# EAGLE board Prototype1.b#2 (EAGLE 6.1)
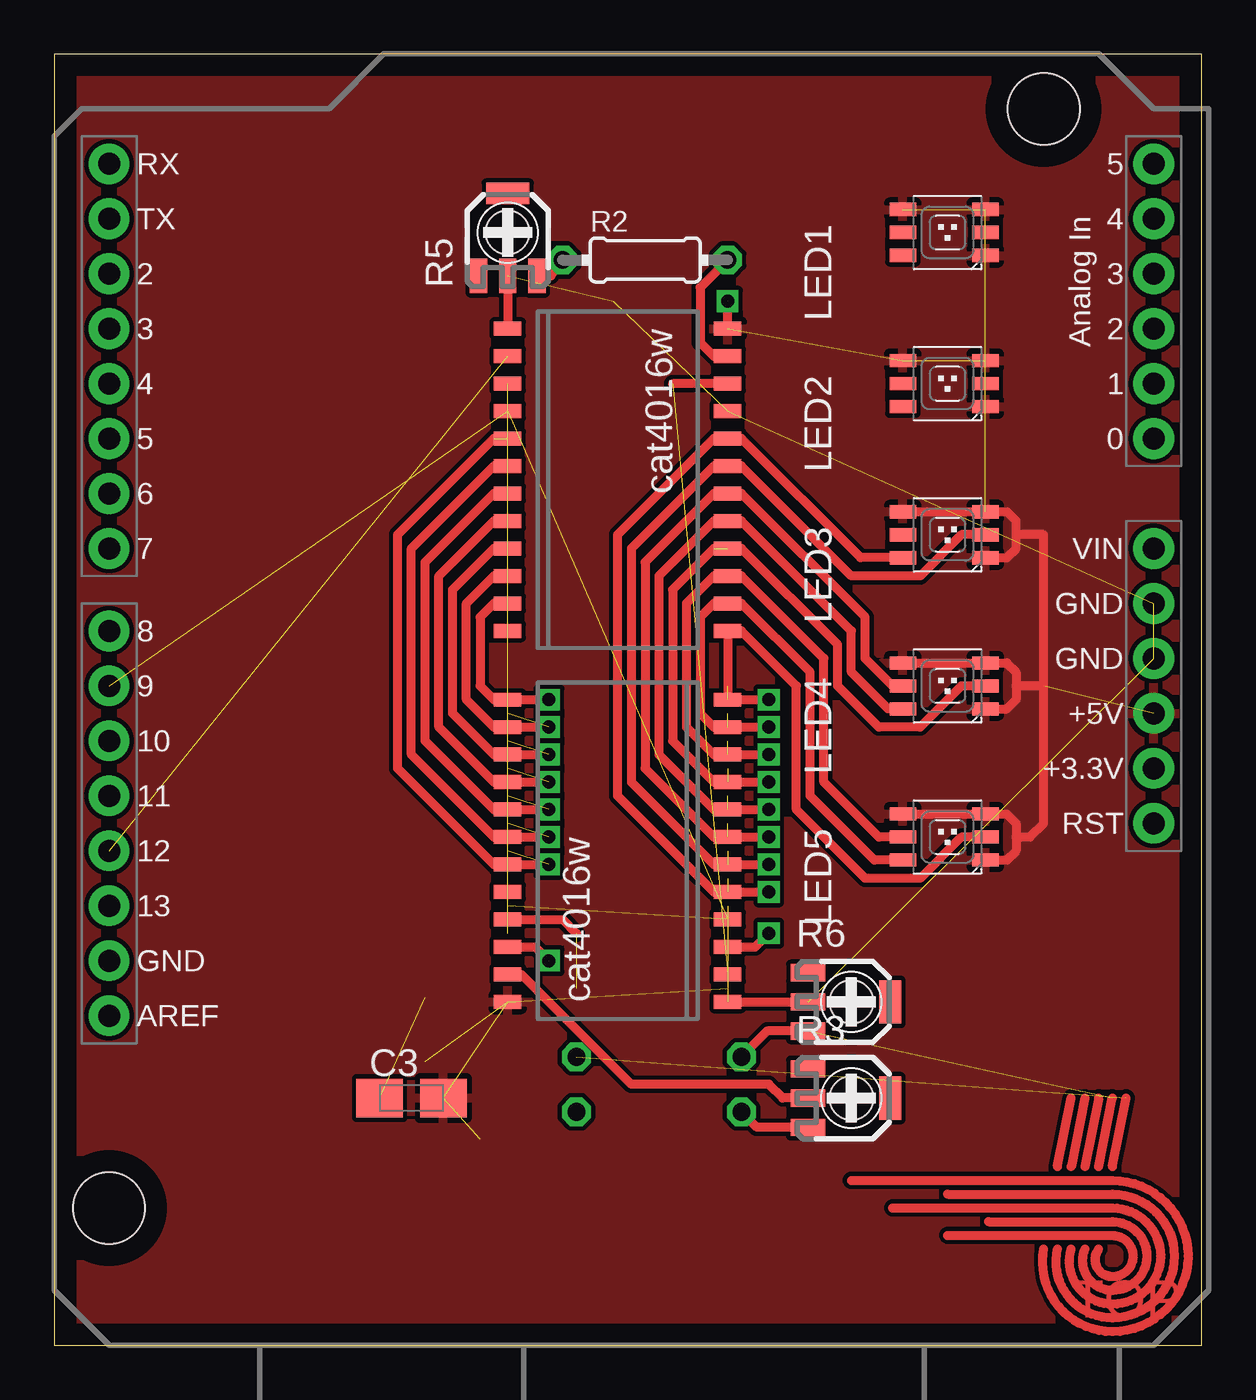
[diagram p0: board, top side]
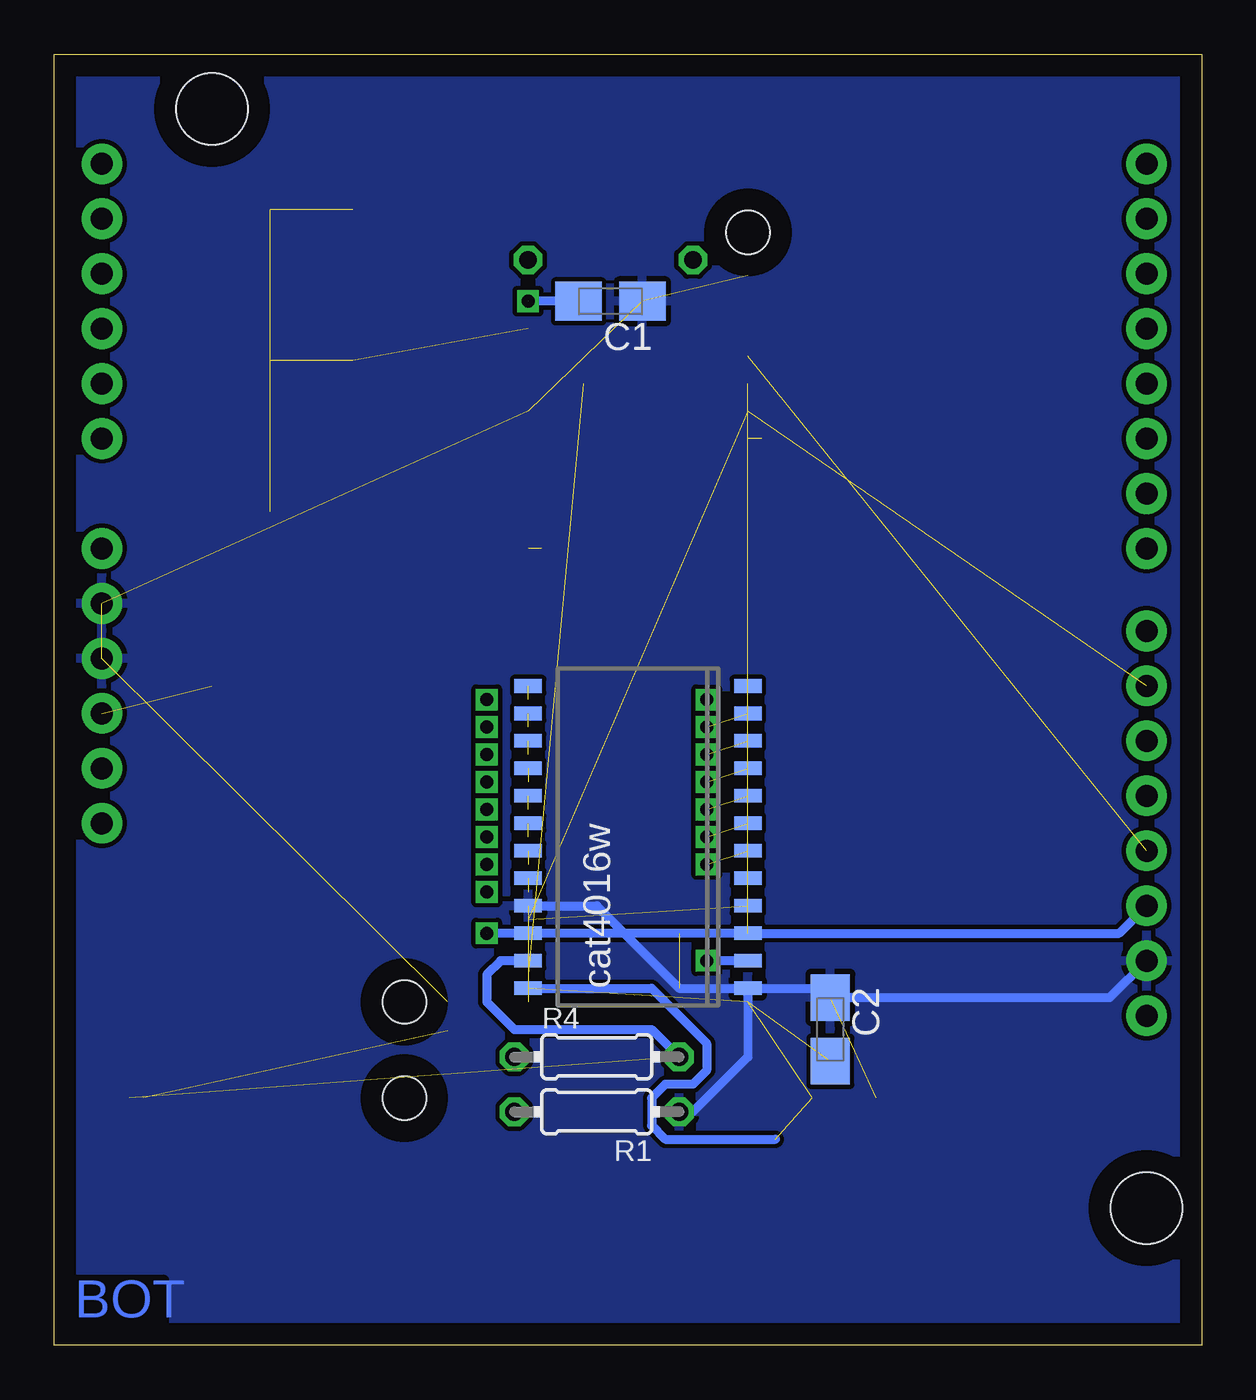
[diagram p1: board, bottom side, seen from below]

Size 53.01 x 59.68 mm. Coordinates in mm from the lower left corner, seen from the top.
Outline: 0,0 53.01,0 53.01,59.68 0,59.68 0,0
Copper layers (1*16): Top 0.035mm / dielectric 1.5mm / Bottom 0.035mm
Design rules: minimum track width 10mil, minimum drill 24mil, track to track 8mil, track to pad 8mil, pad to pad 8mil, via to via 8mil, smd to smd 8mil, copper to edge 40mil, drill to drill 8mil, minimum pad ring 10mil, minimum via ring 8mil, stop-mask expansion 4mil, vias tented up to drill 0mil, thermal gap 10mil

## Footprints (pad centres in the part's own frame; a part is rotated, then mirrored left to right if it is on the bottom)
A/3216-18W = smd 2.15 x 1.8: + 1.475,0; - -1.475,0
P-LCC-6_TOPLED = smd 0.61 x 1.219: A1 -1.062,-1.748; A2 1.062,-1.748; A3 1.062,2.065; C1 -1.062,2.065; C2 0,-1.748; C3 0,2.065
0204/7 = drill 0.813 octagon: 1 -3.81,0; 2 3.81,0
RTRIM3165W = smd 0.8 x 1.6: 1 -1.35,-2; 2 0,-2; 3 1.35,-2 | smd 2 x 1: 4 0,1.8 | hole 2: 0,0
DUEMILANOVE_SHIELD = drill 1.016 pad 1.88: 3.3V 50.8,26.67; 5V 50.8,29.21; A0 50.8,41.91; A1 50.8,44.45; A2 50.8,46.99; A3 50.8,49.53; A4 50.8,52.07; A5 50.8,54.61; AREF 2.54,15.24; D2 2.54,49.53; D3 2.54,46.99; D4 2.54,44.45; D5 2.54,41.91; D6 2.54,39.37; D7 2.54,36.83; D8 2.54,33.02; D9 2.54,30.48; D10 2.54,27.94; D11 2.54,25.4; D12 2.54,22.86; D13 2.54,20.32; GND@0 50.8,31.75; GND@1 50.8,34.29; GND@2 2.54,17.78; RES 50.8,24.13; RX 2.54,54.61; TX 2.54,52.07; VIN 50.8,36.83 | hole 3.302: 45.72,57.15; 2.54,6.35
SOIC24W = smd 0.635 x 1.27: 1 -6.985,-5.08; 2 -5.715,-5.08; 3 -4.445,-5.08; 4 -3.175,-5.08; 5 -1.905,-5.08; 6 -0.635,-5.08; 7 0.635,-5.08; 8 1.905,-5.08; 9 3.175,-5.08; 10 4.445,-5.08; 11 5.715,-5.08; 12 6.985,-5.08; 13 6.985,5.08; 14 5.715,5.08; 15 4.445,5.08; 16 3.175,5.08; 17 1.905,5.08; 18 0.635,5.08; 19 -0.635,5.08; 20 -1.905,5.08; 21 -3.175,5.08; 22 -4.445,5.08; 23 -5.715,5.08; 24 -6.985,5.08

## Placement (x,y rotation side)
C1  [A/3216-18W]  27.3,48.26 180 bottom
C2  [A/3216-18W]  17.14,14.61 270 bottom
C3  [A/3216-18W]  16.51,11.43 0 top
LED1  MULTILED_LRTB_G6TG  [P-LCC-6_TOPLED]  41.27,51.44 90 top
LED2  MULTILED_LRTB_G6TG  [P-LCC-6_TOPLED]  41.27,44.45 90 top
LED3  MULTILED_LRTB_G6TG  [P-LCC-6_TOPLED]  41.27,37.47 90 top
LED4  MULTILED_LRTB_G6TG  [P-LCC-6_TOPLED]  41.27,30.48 90 top
LED5  MULTILED_LRTB_G6TG  [P-LCC-6_TOPLED]  41.27,23.5 90 top
R1  [0204/7]  27.94,10.79 180 bottom
R2  [0204/7]  27.3,50.16 0 top
R3  [RTRIM3165W]  36.83,11.43 270 top
R4  [0204/7]  27.94,13.34 0 bottom
R5  [RTRIM3165W]  20.95,51.44 0 top
R6  [RTRIM3165W]  36.83,15.88 270 top
U1  ARDUINO_SHIELDLABEL  [DUEMILANOVE_SHIELD]  0,0 0 top
U$1  CAT4016  [SOIC24W]  26.04,22.86 90 top
U$2  CAT4016  [SOIC24W]  26.04,23.5 90 bottom
U$3  CAT4016  [SOIC24W]  26.04,40.01 270 top

## Library data of the parts
C1-C3 R1-R6 = rcl
LED1-LED5 = customized
U1 = SparkFun
U$1-U$3 = CAT4016

## Nets
+5V: C1.+ C2.+ C3.+ LED1.A1 LED1.A2 LED1.A3 LED2.A1 LED2.A2 LED2.A3 LED3.A1 LED3.A2 LED3.A3 LED4.A1 LED4.A2 LED4.A3 LED5.A1 LED5.A2 LED5.A3 U1.5V U$1.24 U$2.24 U$3.24
GND: C1.- C2.- C3.- R1.1 R5.2 R6.2 U1.GND@0 U1.GND@1 U1.GND@2 U$1.1 U$1.21 U$2.1 U$2.21 U$3.1 U$3.21
N$1: R2.2 U$3.23
N$2: R2.1 R5.3
N$3: R4.2 U$2.23
N$4: U$1.2 U$3.22
N$5: U1.D12 U$3.2
N$6: U1.D9 U$1.4 U$2.4 U$3.4
N$7: R4.1 R6.3
N$8: R1.2 R3.3
N$9: R3.2 U$1.23
N$10: U$1.22 U$2.2
N$14: U1.D13 U$1.3 U$2.3 U$3.3
N$15: LED5.C2 U$1.12 U$2.13 U$3.13
N$18: LED5.C1 U$1.11 U$2.14 U$3.14
N$19: LED5.C3 U$1.10 U$2.15 U$3.15
N$20: LED4.C2 U$1.9 U$2.16 U$3.16
N$21: LED4.C1 U$1.8 U$2.17 U$3.17
N$22: LED4.C3 U$1.7 U$2.18 U$3.18
N$23: LED3.C2 U$1.6 U$2.19 U$3.19
N$25: U$1.13 U$2.12 U$3.11
N$31: U$1.14 U$2.11 U$3.10
N$32: U$1.15 U$2.10 U$3.9
N$33: U$1.16 U$2.9 U$3.8
N$34: U$1.17 U$2.8 U$3.7
N$39: U$1.18 U$2.7 U$3.6
N$43: U$1.19 U$2.6 U$3.5
N$59: LED3.C1 U$1.5 U$2.20 U$3.20

## Tracks (layer width: path | path; a pad name or v marks a point on that pad's centre or on a via)
+5V  (13 unrouted)
  Top 0.406: LED3.A3 LED3.A2 44.02,38.53 44.45,38.1 44.45,37.47 | LED3.A1 44.02,36.4 44.45,36.83 44.45,37.47 | LED4.A3 LED4.A2 44.02,31.54 44.45,31.11 44.45,30.48 | 44.45,30.48 44.45,29.84 44.02,29.42 LED4.A1 | LED5.A3 LED5.A2 44.02,24.56 44.45,24.13 44.45,23.5 | 44.45,23.5 44.45,22.86 44.02,22.43 LED5.A1 | 44.45,23.5 45.09,23.5 45.72,24.13 45.72,30.48 | 45.72,30.48 44.45,30.48 | 45.72,30.48 45.72,37.47 44.45,37.47 | U$3.24 31.11,48.26
  Bottom 0.406: C1.+ 31.11,48.26 | U$2.24 25.4,16.51 22.86,13.97 22.86,12.7 23.5,12.06 24.77,12.06 25.4,11.43 25.4,10.16 24.77,9.53 19.68,9.53
  pour Top: 0,0 53.34,0 53.34,59.69 0,59.69
GND  (8 unrouted)
  Top 0.406: R5.2 U$3.1 | U$1.21 23.5,19.68 24.13,19.05 | U$1.1 R6.2
  Bottom 0.406: U$2.1 20.95,13.34 23.5,10.79 R1.1 | U$2.21 27.94,20.32 24.13,16.51 U$2.1 | U$2.1 17.57,16.51 C2.- 4.24,16.08 U1.GND@2
  pour Bottom: 0,59.69 53.34,59.69 53.34,0 0,0
N$1
  Top 0.406: R2.2 29.84,48.9 29.84,46.35 30.48,45.72 U$3.23
N$2
  Top 0.406: R5.3 22.95,49.44 R2.1
N$3  (1 unrouted)
  Top 0.406: 48.9,8.26 49.53,11.43
  Bottom 0.406: U$2.23 32.38,17.78 33.02,17.14 33.02,15.88 31.75,14.61 25.4,14.61 R4.2
N$4  (1 unrouted)
  Top 0.406: U$3.22 28.57,44.45
N$5  (1 unrouted)
N$6  (3 unrouted)
N$7  (1 unrouted)
  Top 0.406: 48.26,8.26 48.9,11.43 | R6.3 32.94,14.53 R4.1
N$7  (via drill 0.6)
  other vias: 31.11,48.26
N$8
  Top 0.406: R3.3 32.47,10.08 R1.2
N$9
  Top 0.406: R3.2 33.66,11.43 33.02,12.06 26.67,12.06 21.59,17.14 U$1.23
N$10  (1 unrouted)
  Top 0.406: U$1.22 22.23,18.41 22.86,17.78
  Bottom 0.406: U$2.2 22.86,17.78
N$11
  Top 0.406: 48.26,11.43 47.62,8.26
N$12
  Top 0.406: 47.62,11.43 46.99,8.26
N$13
  Top 0.406: 46.35,8.26 46.99,11.43
N$14  (2 unrouted)
  Top 0.406: U$1.3 32.38,18.41 33.02,19.05
  Bottom 0.406: 33.02,19.05 U$2.3 3.81,19.05 U1.D13
N$15  (1 unrouted)
  Top 0.406: 33.02,29.84 U$1.12 U$3.13 31.75,33.02 34.29,30.48 34.29,24.77 37.47,21.59 40.01,21.59 41.91,23.5 LED5.C2
N$16  (via drill 0.6)
  other vias: 33.02,19.05
N$18  (1 unrouted)
  Top 0.406: 33.02,28.57 U$1.11 30.48,28.57 29.84,29.21 29.84,33.66 30.48,34.29 U$3.14 31.75,34.29 34.92,31.11 34.92,25.4 37.89,22.43 LED5.C1
N$19  (1 unrouted)
  Top 0.406: 33.02,27.3 U$1.10 30.48,27.3 29.21,28.57 29.21,34.29 30.48,35.56 U$3.15 31.75,35.56 35.56,31.75 35.56,26.04 38.1,23.5 LED5.C3
N$20  (2 unrouted)
  Top 0.406: 30.48,36.83 28.57,34.92 28.57,27.94 30.48,26.04 U$1.9 33.02,26.04 | LED4.C2 41.91,30.48 40.01,28.57 38.1,28.57 36.2,30.48 36.2,32.38 31.75,36.83 U$3.16
N$21  (1 unrouted)
  Top 0.406: 33.02,24.77 U$1.8 30.48,24.77 27.94,27.3 27.94,35.56 30.48,38.1 U$3.17 31.75,38.1 36.83,33.02 36.83,31.11 38.53,29.42 LED4.C1
N$22  (1 unrouted)
  Top 0.406: 33.02,23.5 U$1.7 30.48,23.5 27.3,26.67 27.3,36.2 30.48,39.37 U$3.18 31.75,39.37 37.47,33.66 37.47,31.75 38.73,30.48 LED4.C3
N$23  (1 unrouted)
  Top 0.406: 33.02,22.23 U$1.6 30.48,22.23 26.67,26.04 26.67,36.83 30.48,40.64 U$3.19 31.75,40.64 36.83,35.56 40.01,35.56 41.91,37.47 LED3.C2
N$24  (via drill 0.6)
  other vias: 22.86,17.78
N$25  (1 unrouted)
  Top 0.406: U$3.11 20.32,34.29 19.68,33.66 19.68,30.48 20.32,29.84 U$1.13 22.86,29.84
N$31  (1 unrouted)
  Top 0.406: U$3.10 20.32,35.56 19.05,34.29 19.05,29.84 20.32,28.57 U$1.14 22.86,28.57
N$32  (1 unrouted)
  Top 0.406: U$3.9 20.32,36.83 18.41,34.92 18.41,29.21 20.32,27.3 U$1.15 22.86,27.3
N$33  (1 unrouted)
  Top 0.406: U$3.8 20.32,38.1 17.78,35.56 17.78,28.57 20.32,26.04 U$1.16 22.86,26.04
N$34  (1 unrouted)
  Top 0.406: U$3.7 20.32,39.37 17.14,36.2 17.14,27.94 20.32,24.77 U$1.17 22.86,24.77
N$35
  Top 0.406: 41.27,5.08 48.9,5.08 arc-180 48.9,3.17 arc-127 48.26,4.45
N$38
  Top 0.406: 43.18,5.71 48.9,5.71 arc-180 48.9,2.54 arc-113 47.62,4.45
N$39  (1 unrouted)
  Top 0.406: U$3.6 20.32,40.64 16.51,36.83 16.51,27.3 20.32,23.5 U$1.18 22.86,23.5
N$40
  Top 0.406: 38.73,6.35 48.9,6.35 arc-180 48.9,1.91 arc-106 46.99,4.45
N$41
  Top 0.406: 41.27,6.99 48.9,6.99 arc-180 48.9,1.27 arc-103 46.35,4.45
N$42
  Top 0.406: 36.83,7.62 48.9,7.62 arc-180 48.9,0.64 arc-100 45.72,4.45
N$43  (2 unrouted)
  Top 0.406: 20.32,41.91 15.88,37.47 15.88,26.67 20.32,22.23 U$1.19 22.86,22.23
N$44  (via drill 0.6)
  other vias: 22.86,29.84
N$45  (via drill 0.6)
  other vias: 22.86,28.57
N$46  (via drill 0.6)
  other vias: 22.86,27.3
N$47  (via drill 0.6)
  other vias: 22.86,26.04
N$48  (via drill 0.6)
  other vias: 22.86,24.77
N$49  (via drill 0.6)
  other vias: 22.86,23.5
N$50  (via drill 0.6)
  other vias: 22.86,22.23
N$51  (via drill 0.6)
  other vias: 33.02,29.84
N$52  (via drill 0.6)
  other vias: 33.02,28.57
N$53  (via drill 0.6)
  other vias: 33.02,27.3
N$54  (via drill 0.6)
  other vias: 33.02,26.04
N$55  (via drill 0.6)
  other vias: 33.02,24.77
N$56  (via drill 0.6)
  other vias: 33.02,23.5
N$57  (via drill 0.6)
  other vias: 33.02,22.23
N$58  (via drill 0.6)
  other vias: 33.02,20.95
N$59  (1 unrouted)
  Top 0.406: 33.02,20.95 U$1.5 30.48,20.95 26.04,25.4 26.04,37.47 30.48,41.91 U$3.20 31.75,41.91 37.26,36.4 LED3.C1

## Text on the board
Top: TOP
Bottom: BOT